# EAGLE board Aqua (EAGLE 7.0.0)
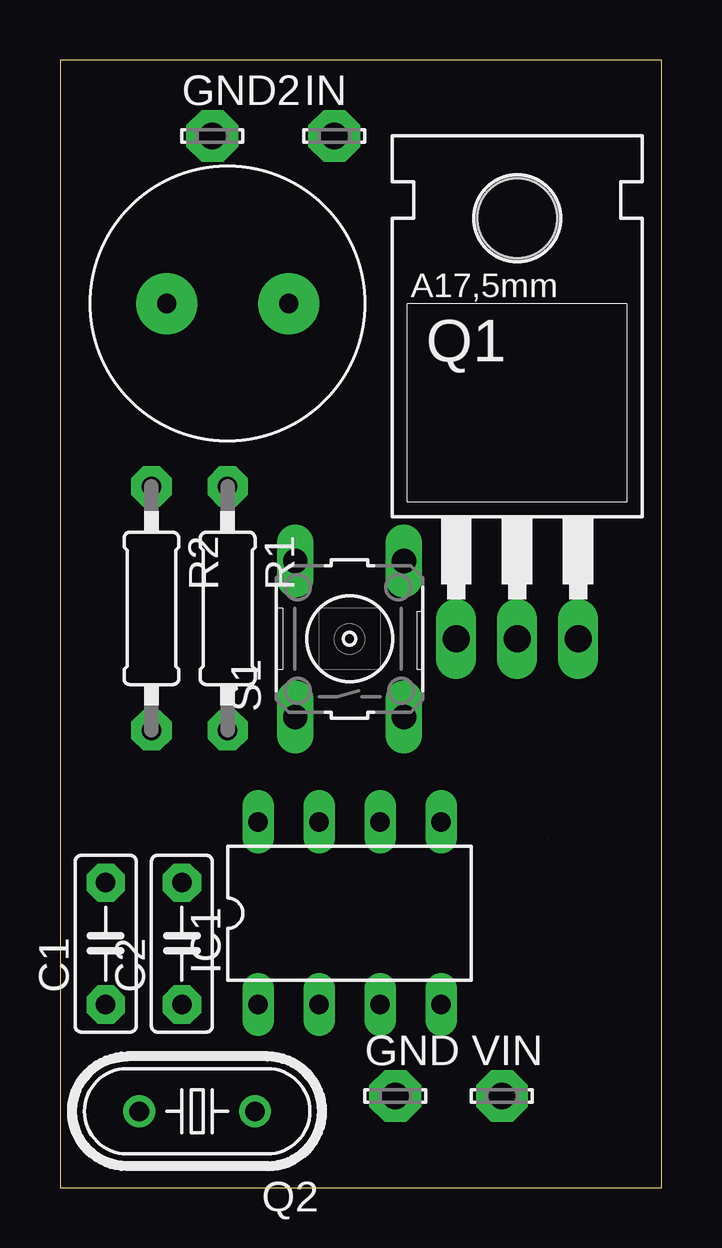
[diagram p0: board, top side]
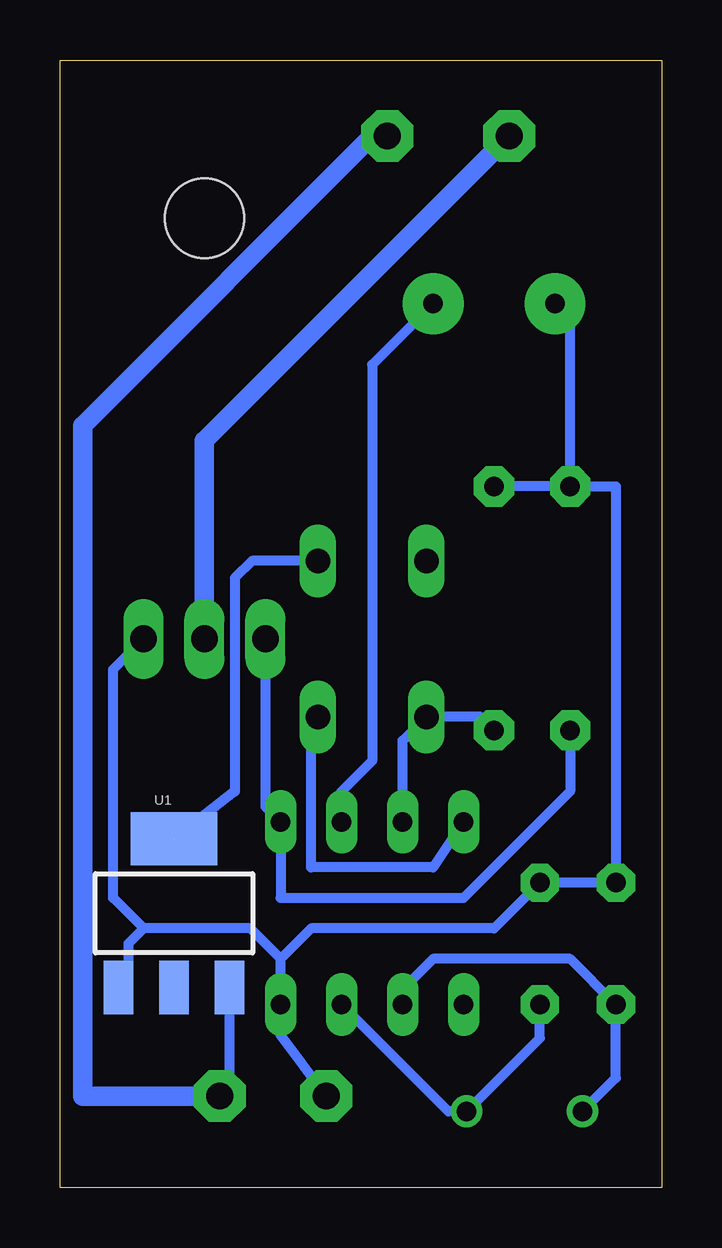
[diagram p1: board, bottom side, seen from below]

Size 25.07 x 46.98 mm. Coordinates in mm from the lower left corner, seen from the top.
Outline: 0,0 25.07,0 25.07,46.98 0,46.98 0,0
Copper layers (1*16): Top 0.035mm / dielectric 1.5mm / Bottom 0.035mm
Design rules "default": minimum track width 10mil, minimum drill 24mil, track to track 8mil, track to pad 8mil, pad to pad 8mil, via to via 8mil, smd to smd 8mil, copper to edge 40mil, drill to drill 8mil, minimum pad ring 10mil, minimum via ring 8mil, stop-mask expansion 4mil, vias tented up to drill 0mil, thermal gap 10mil
Net classes: 0 default: width 0.305 mm, drill 0.508 mm, clearance 0.254 mm

## Footprints (pad centres in the part's own frame; a part is rotated, then mirrored left to right if it is on the bottom)
C5B2.5 = drill 0.813 pad 1.6 octagon: 1 -2.54,0; 2 2.54,0
LSP11 = drill 1.118 pad 2.159 octagon: MP 0,0
DIL08 = drill 0.813 long: 1 -3.81,-3.81; 2 -1.27,-3.81; 3 1.27,-3.81; 4 3.81,-3.81; 5 3.81,3.81; 6 1.27,3.81; 7 -1.27,3.81; 8 -3.81,3.81
TO220AH = drill 1.118 long: B -2.54,-6.35; C 0,-6.35; E 2.54,-6.35 | hole 3.302: 0,11.176
HC49U-V = drill 0.813: 1 -2.413,0; 2 2.413,0
0207/10 = drill 0.813 pad 1.676 octagon: 1 -5.08,0; 2 5.08,0
B3F-10XX = drill 1.016 long: 1 -3.251,2.261; 2 3.251,2.261; 3 -3.251,-2.261; 4 3.251,-2.261
SOT223 = smd 1.219 x 2.235: 1 -2.311,-3.099; 2 0,-3.099; 3 2.311,-3.099 | smd 3.6 x 2.2: 4 0,3.099
DGGDG = drill 0.8 pad 2.54: P$1 -2.54,0; P$2 2.54,0

## Placement (x,y rotation side)
C1  22pF  [C5B2.5]  1.91,10.16 90 top
C2  22pF  [C5B2.5]  5.08,10.16 90 top
GND  LSP11  [LSP11]  13.97,3.81 0 top
GND2  LSP11  [LSP11]  6.35,43.81 0 top
IC1  TINY13-20PU  [DIL08]  12.06,11.43 0 top
IN  LSP11  [LSP11]  11.43,43.81 0 top
Q1  IRF3704  [TO220AH]  19.05,29.21 0 top
Q2  20MHz  [HC49U-V]  5.71,3.17 180 top
R1  10K  [0207/10]  6.99,24.13 270 top
R2  10K  [0207/10]  3.81,24.13 270 top
S1  [B3F-10XX]  12.06,22.86 90 top
U1  [SOT223]  20.32,11.43 0 bottom
U$1  COMPUTER_BUZZERCOMPUTER_BUZZER  [DGGDG]  6.99,36.83 0 top
VIN  LSP11  [LSP11]  18.41,3.81 0 top

## Library data of the parts
C1 C2 = capacitor-wima
GND GND2 IN VIN = solpad
IC1 = atmel; MPN: ATTINY13-20PU; OC_FARNELL: 9171550; OC_NEWARK: 96K6521
Q1 = transistor-power
Q2 = adafruit; OC_FARNELL: 1666969; OC_NEWARK: unknown
R1 R2 = adafruit
S1 = switch-omron; MPN: B3F-1000; OC_FARNELL: 176432; OC_NEWARK: 36M3542
U1 = SparkFun-PowerIC; PROD_ID: VREG-08170
U$1 = Computer_Buzzer

## Nets
+5V: S1.4 U1.4
GND: C1.2 C2.2 GND.MP IC1.4 Q1.E R1.1 R2.1 U1.1 U$1.P$1
N$1: GND2.MP Q1.C
N$2: IC1.6 U$1.P$2
N$3: C1.1 IC1.2 Q2.2
N$4: IC1.7 R1.2 S1.1
N$5: IC1.5 Q1.B R2.2
N$6: C2.1 IC1.3 Q2.1
N$7: IC1.8 S1.3
N$8: IN.MP U1.3 VIN.MP

## Tracks (layer width: path | path; a pad name or v marks a point on that pad's centre or on a via)
+5V  (1 unrouted)
  Bottom 0.406: S1.4 17.07,26.11 17.78,25.4 17.78,16.51 U1.4
GND
  Bottom 0.406: GND.MP 15.88,6.35 IC1.4 15.88,9.53 | R2.1 1.91,29.21 C1.2 C2.2 6.99,10.79 14.61,10.79 15.88,9.53 | R2.1 R1.1 | R2.1 3.81,36.2 U$1.P$1 | 15.88,9.53 17.14,10.79 21.59,10.79 | 21.59,10.79 22.23,10.16 22.23,8.74 U1.1 | 21.59,10.79 22.86,12.06 22.86,21.59 Q1.E
N$1
  Bottom 0.813: GND2.MP 19.05,31.11 Q1.C
N$2
  Bottom 0.406: U$1.P$2 12.06,34.29 12.06,17.78 13.34,16.51 IC1.6
N$3
  Bottom 0.406: Q2.2 1.91,4.57 C1.1 3.81,9.53 9.53,9.53 10.79,8.26 IC1.2
N$4
  Bottom 0.406: IC1.7 10.79,18.62 S1.1 7.54,19.61 R1.2
N$5
  Bottom 0.406: Q1.B 16.51,15.88 IC1.5 15.88,12.06 8.26,12.06 3.81,16.51 R2.2
N$6
  Bottom 0.406: C2.1 5.08,6.22 Q2.1 8.89,3.17 IC1.3
N$7
  Bottom 0.406: S1.3 14.61,19.33 14.61,13.34 9.53,13.34 IC1.8
N$8
  Bottom 0.406: U1.3 18.01,4.22 VIN.MP
  Bottom 0.813: IN.MP 12.06,43.81 24.13,31.75 24.13,3.81 VIN.MP